# Altium PCB PCB.ESP8266.PcbDoc
Units mil, origin at the board's own origin, x right, y up, seen from the top; angles counter-clockwise.
Board outline 1110 x 1885 mil, 2 copper layers (Top Layer, Bottom Layer); 28 components, 25 nets, 141 pads, 234 vias.
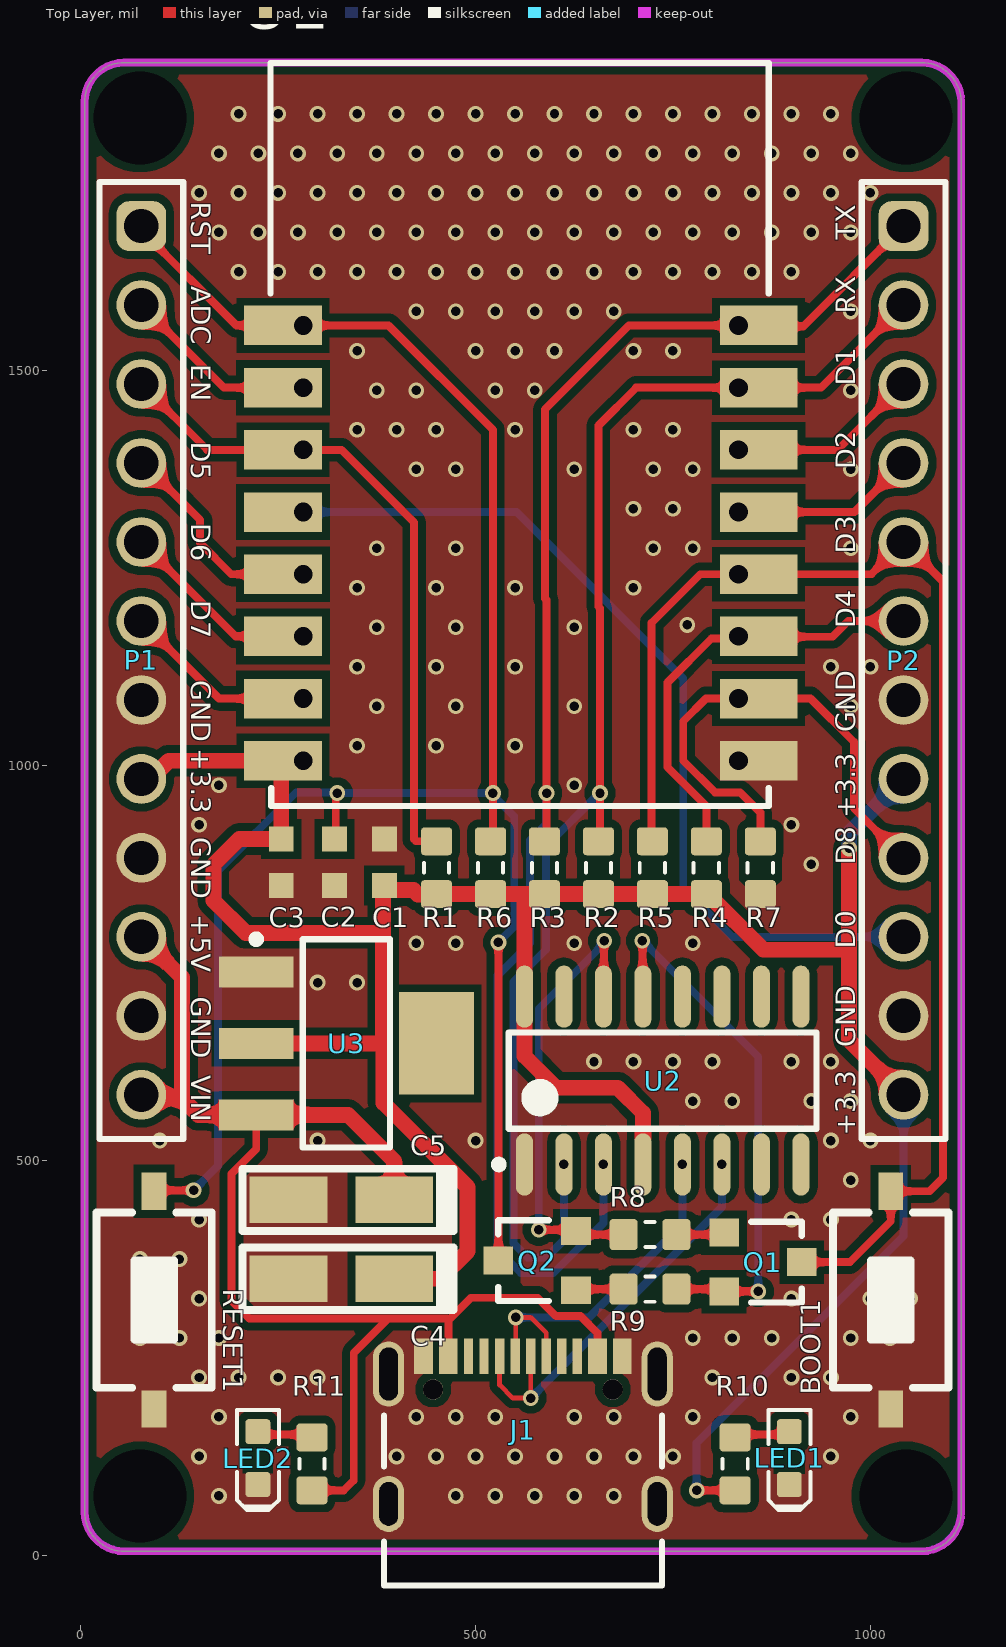
[diagram p0: Top Layer view]
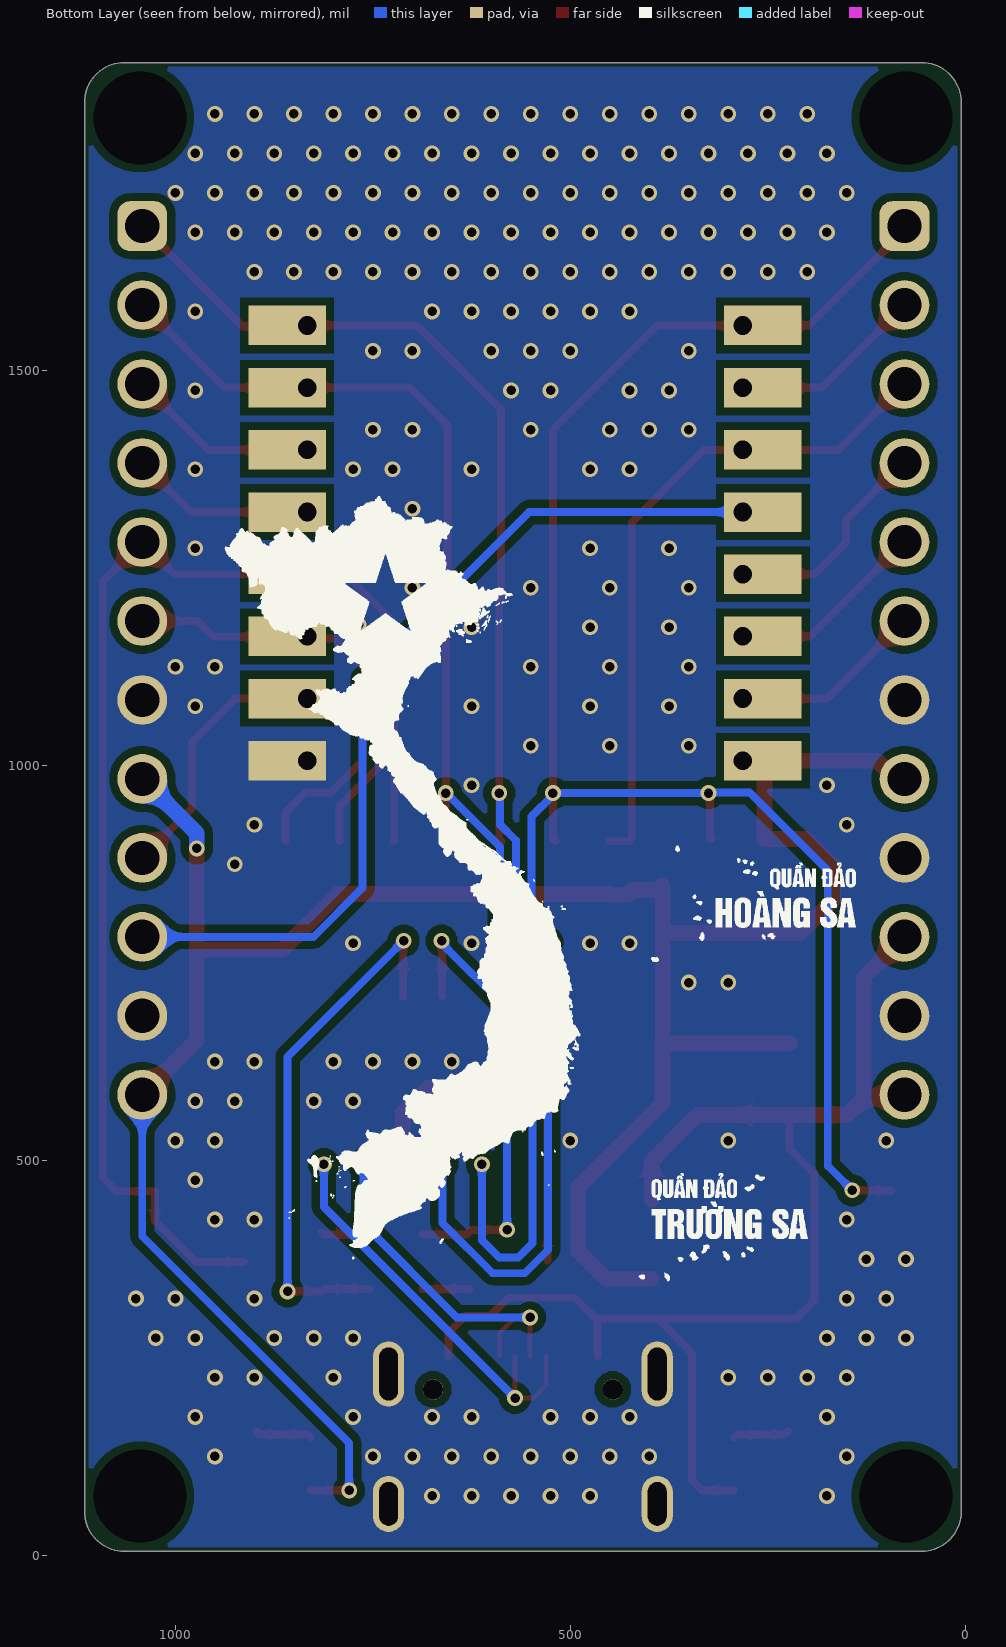
[diagram p1: Bottom Layer view, seen from below]
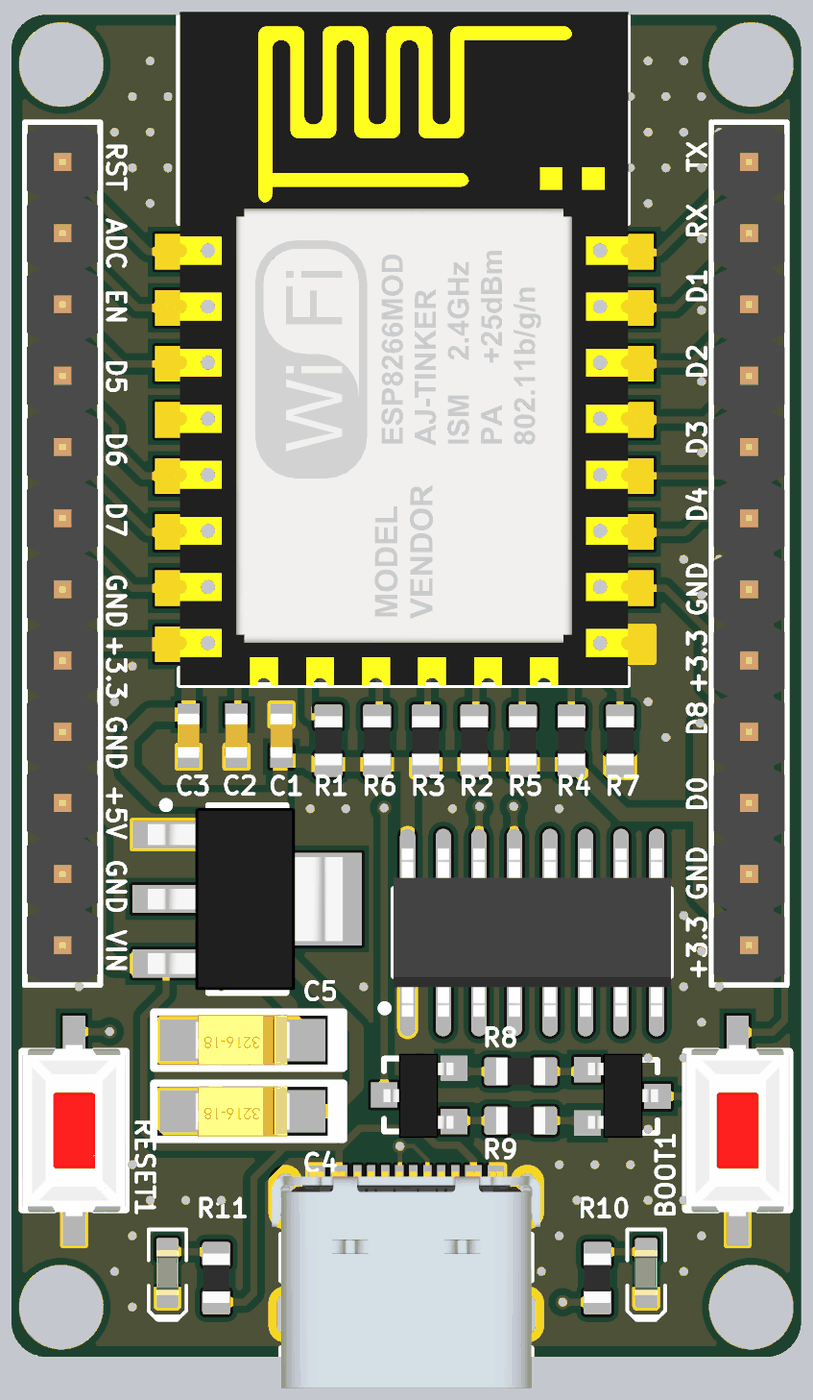
[diagram p2: 3D render of the assembled board from above, using the file's embedded part models]

## Layer stack, top to bottom
Top Solder: solder mask 0.4, Solder Resist, Dk 3.5
Top Layer: signal copper 1.4
Dielectric 1: dielectric 12.6, FR-4, Dk 4.8
Bottom Layer: signal copper 1.4
Bottom Solder: solder mask 0.4, Solder Resist, Dk 3.5

## Board outline
5,55 5,1840 cw(c55,1840) 55,1890 1065,1890 cw(c1065,1840) 1115,1840 1115,55 cw(c1065,55) 1065,5 55,5 cw(c55,55)

## Design rules (kind name [scope] priority, off if disabled: settings)
Clearance "Stitching GND" [IsStitchingVia and InNet('GND') vs (IsVia and (Not IsStitchingVia)) Or IsPad] p1: gap=10 ignorepadtopadclearanceinfootprint=FALSE
Clearance [All] p2: gap=10 ignorepadtopadclearanceinfootprint=FALSE
PlaneConnect [All] p1: planeconnectstyle=Direct reliefexpansion=20 reliefentries=4 reliefconductorwidth=10 reliefairgap=10
PolygonConnect [All] p1: connectstyle=Direct reliefconductorwidth=10 reliefentries=4 polygonreliefangle="90 Angle" airgapwidth=10
RoomDefinition SCH.ESP8266 [InComponentClass('SCH.ESP8266')] p1: confinementstyle=ConfineIn formatcopy=TRUE lockcomponents=FALSE outline -5675,-2675 -3675,-2675 -3675,-1675 -5675,-1675
RoutingVias [All] p1: holewidth=28 width=50 viastyle="Through Hole" minholewidth=12 minwidth=20 maxholewidth=20 maxwidth=35
SolderMaskExpansion [All] p1: expansion=4 istentingtop=FALSE
Width [All] p1: maxlimit=20 minlimit=6 preferedwidth=10
29 further rules are at their usual default settings.

## Classes and differential pairs
component class SCH.ESP8266: BOOT1 C1 C3 C5 J1 LED1 LED2 P1 P2 Q1 Q2 R1 R2 R3 R4 R6 R8 R9 R10 R11 RESET1 U1 U2 U3

## Components (designator, comment, footprint, x,y, rotation, side; value= is the part's Value field where it differs from the comment)
BOOT1 "SW" SW1-SMD 1025.81,323 r270 top value="SW chip 2 pin"
C1 "100nF, 25V" WCAP-CSGP_0603_L1.6W0.8H0.8_Reflow 384.5,877.43 r270 top
C2 "10uF, 6.3V" WCAP-CSGP_0603_L1.6W0.8H0.8_Reflow 321.34,877.43 r270 top
C3 "100nF, 25V" WCAP-CSGP_0603_L1.6W0.8H0.8_Reflow 254,877.43 r90 top
C4 "10uF" "tu tantalum smd3216" 330,350 r180 top
C5 "10uF" "tu tantalum smd3216" 330,450 r180 top
J1 "629722000214" 629722000214 560,110 r0 top
LED1 "Green" LED-0603-GREEN 897.31,123 r270 top
LED2 "Green" LED-0603-GREEN 224.31,123 r270 top
P1 "61301211121" 61301211121 76.8,1133 r270 top
P2 "61301211121" 61301211121 1042,1133 r270 top
Q1 "2N222" SOT23-231 863.89,371 r270 top value=C1815
Q2 "2N222" SOT23-231 578,372.89 r90 top value=C1815
R1 "Thick Film" RESC1608X55N 450.61,870.54 r90 top value=10K
R2 "Thick Film" RESC1608X55N 655.61,870.54 r90 top value=10K
R3 "Thick Film" RESC1608X55N 587.28,870.54 r90 top value=10K
R4 "Thick Film" RESC1608X55N 792.27,870.54 r90 top value=10K
R5 "Thick Film" RESC1608X55N 723.94,870.54 r90 top value=10K
R6 "Thick Film" RESC1608X55N 518.94,870.54 r90 top value=10K
R7 "Thick Film" RESC1608X55N 860.6,870.54 r90 top value=10K
R8 "Thick Film" RESC1608X55N 720.95,406 r0 top value=10K
R9 "Thick Film" RESC1608X55N 720.95,336.93 r180 top value=10K
R10 "Thick Film" RESC1608X55N 828.7,115.58 r90 top value=1K5
R11 "Thick Film" RESC1608X55N 292.93,115.58 r90 top value=1K5
RESET1 "SW" SW1-SMD 92.99,323 r270 top value="SW chip 2 pin"
U1 "ESP 12" ESP12E 557.41,1281.57 r0 top
U2 "CH340G" SO16 737,601 r90 top
U3 "LM1117-3.3V" SOT223 336.44,648.08 r270 top

## Footprints (in the part's own frame and the unit in brackets; to place one, negate y for a bottom-side part, rotate by r counter-clockwise, add the part's x,y. Pads: shape width x height; smd on the part's side, far side on the other; paste and mask are expansions set on the pad)
61301211121 [mm] "Pin Header, pitch 2.54 mm, THT, Vertical, single row, 12p"
  rrect50% 1.6x1.6 hole 1.1: 1(-13.97,0)
  round 1.6 hole 1.1: 2(-11.43,0) 3(-8.89,0) 4(-6.35,0) 5(-3.81,0) 6(-1.27,0) 7(1.27,0) 8(3.81,0) 9(6.35,0) 10(8.89,0) 11(11.43,0) 12(13.97,0)
  silkscreen extent -15.39,-1.35 15.39,1.35, body extent -15.24,-1.27 15.24,1.27, height 8.57
629722000214 [mm] "USB TYPE C VERTICAL PLUG"
  rect 0.6x1.14 smd: A1/B12(-3.2,3.605) A4/B9(-2.4,3.605) A9/B4(2.4,3.605) A12/B1(3.2,3.605)
  rect 0.3x1.14 smd: A5(-1.25,3.605) A6(-0.25,3.605) A7(0.25,3.605) A8(1.25,3.605) B5(1.75,3.605) B6(0.75,3.605) B7(-0.75,3.605) B8(-1.75,3.605)
  round 0.65 hole 0.65 unplated: MH1(-2.89,2.535) MH2(2.89,2.535)
  oval 1x1.8 hole 0.6 slot 1.4 at 90 deg: Shell(-4.32,-1.145) Shell(4.32,-1.145)
  oval 1x2.1 hole 0.6 slot 1.7 at 90 deg: Shell(-4.32,3.035) Shell(4.32,3.035)
  silkscreen extent -4.47,-3.76 4.47,1.7, body extent -4.79,-3.76 4.79,3.95, height 3.33
ESP12E [mm]
  rect 2.5x1.27 hole 0.6 copper offset -0.65,0: 1(-7,7) 2(-7,5) 3(-7,3) 4(-7,1) 5(-7,-1) 6(-7,-3) 7(-7,-5) 8(-7,-7)
  rect 2.5x1.27 hole 0.6 copper offset 0.65,0: 9(7,-7) 10(7,-5) 11(7,-3) 12(7,-1) 13(7,1) 14(7,3) 15(7,5) 16(7,7)
  silkscreen extent -8.05,-8.46 7.98,15.44, body extent -8.02,-8.46 7.99,15.54, height 2.65
LED-0603-GREEN [mm]
  round 0.254 on Mech15: 0(0,0)
  rrect25% 0.8x0.8 smd: A(-0.85,0) K(0.85,0)
  Top Layer pour cut-out: -0.5,0.5 0.5,0.5 0.5,-0.5 -0.5,-0.5
  silkscreen extent -1.55,-0.67 1.68,0.67, body extent -0.8,-0.4 0.8,0.4, height 0.75
RESC1608X55N [mm] "Chip Resistor, Body 1.6x0.8mm, EIA 0603, IPC Medium Density"
  round 0.254 on Mech15: 0(0,0)
  rrect25% 0.9x1 smd: 1(-0.85,0) 2(0.85,0)
  Top Layer pour cut-out: -0.6,0.5 -0.4,0.7 0.4,0.7 0.6,0.5 0.6,-0.5 0.4,-0.7 -0.4,-0.7 -0.6,-0.5
  silkscreen extent -0.15,-0.41 0.15,0.41, body extent -0.87,-0.47 0.88,0.48, height 0.54
SO16 [mm] "SOIC, 16-Leads, Body 9.90x3.91mm, Pitch 1.27mm, IPC Medium Density"
  oval 2x0.55 smd: 1(-2.7,4.445) 2(-2.7,3.175) 3(-2.7,1.905) 4(-2.7,0.635) 5(-2.7,-0.635) 6(-2.7,-1.905) 7(-2.7,-3.175) 8(-2.7,-4.445) 9(2.7,-4.445) 10(2.7,-3.175) 11(2.7,-1.905) 12(2.7,-0.635) 13(2.7,0.635) 14(2.7,1.905) 15(2.7,3.175) 16(2.7,4.445)
  silkscreen extent -2.82,-4.95 1.55,5.39, body extent -3,-4.95 3,4.95, height 1.4
SOT23-231 [mm]
  rect 0.9x0.95 smd mask+0: 1(0.95,-1.25)
  rect 0.9x0.95 smd: 2(-0.95,-1.25) 3(0,1.25)
  silkscreen extent -1.3,-0.38 1.3,1.25, body extent -1.52,-1.23 1.48,1.27, height 1.06
SOT223 [mm]
  rect 1x2.4 smd: 1(-2.3,-2.9) 2(0,-2.9) 3(2.3,-2.9)
  rect 3.3x2.4 smd: 4(0,2.9)
  silkscreen extent -3.47,-3.02 3.35,1.4, body extent -3.25,-3.56 3.25,3.4, height 1.68
SW1-SMD [mm]
  rect 1.2x0.8 smd: 1(-3.5,0) 2(3.5,0)
  silkscreen extent -2.82,-1.85 2.82,1.85, body extent -3.05,-1.85 3.05,1.85, height 2.5
"tu tantalum smd3216" [mm]
  rect 2.5x1.5 smd: 1(-1.7,0) 2(1.7,0)
  silkscreen extent -3.61,-1 3.17,1, body extent -1.7,-0.9 1.7,0.9, height 1.69
WCAP-CSGP_0603_L1.6W0.8H0.8_Reflow [mm] "Ceramic Capacitors, body 1.6x0.8mm"
  rect 0.8x0.8 smd: 1(-0.75,0) 2(0.75,0)
  body extent -0.8,-0.4 0.8,0.4, height 0.8

## Part data
BOOT1 RESET1: library part SW2, "Switch button 2 pin"
C1 C3: library part 885012206071, "WCAP-CSGP Multilayer Ceramic Chip Capacitor, General Purpose, size 0603, X7R, 100nF, 25V", Capacitance=100nF, Capacitance Tolerance=+/-10%, Isolation Resistance=5GOhm, Manufacturer="Wurth Elektronik", Operating Temperature max.=125C, Operating Temperature min.=-55C, Rated Voltage=25V, Ceramic Type=X7R, ComponentLink1Description="Manufacturer Link", ComponentLink1URL=http://www.we-online.de, ComponentLink2Description=Datasheet, ComponentLink2URL=https://www.we-online.com/catalog/datasheet/885012206071.pdf, Dissipation Factor=3.5%, Height=0.8mm, Length=1.6mm, Manufacturer Part Number=885012206071, Mounting Technology=SMT, Packaging="Tape and Reel", Size=0603, Technical Reference=X7R0603104K025DFCT10000, Width=0.8mm
C2: library part 885012106006, "WCAP-CSGP Multilayer Ceramic Chip Capacitor, General Purpose, size 0603, X5R, 10uF, 6.3V", Capacitance=10uF, Capacitance Tolerance=+/-20%, Isolation Resistance=0.01GOhm, Manufacturer="Wurth Elektronik", Operating Temperature max.=85C, Operating Temperature min.=-55C, Rated Voltage=6.3V, Ceramic Type=X5R, ComponentLink1Description="Manufacturer Link", ComponentLink1URL=http://www.we-online.de, ComponentLink2Description=Datasheet, ComponentLink2URL=https://www.we-online.com/catalog/datasheet/885012106006.pdf, Dissipation Factor=10%, Height=0.8mm, Length=1.6mm, Manufacturer Part Number=885012106006, Mounting Technology=SMT, Packaging="Tape and Reel", Size=0603, Technical Reference=X5R0603106M6R3DFCT10000, Width=0.8mm
C4 C5: library part "Tu tantalum 10uF 16V SMD3216", "Dán", Chung_Loai=Dán, Don_Vi=Con, Ma_Hang=MH001954, So_Chan=2, Ten_Linh_Kien="Tụ tantalum 106C-10uF 16V SMD3216"
J1: "WR-COM USB 2.0 Type C Receptacle Horizontal SMT", Manufacturer="Wurth Elektronik", Operating Temperature Max=85°C, Operating Temperature Min=-40°C, Rated Current=5A, Working Voltage="20V (DC)", Application="USB 2.0", Category="Input/Output Connectors", ComponentLink1Description="Website Link", ComponentLink1URL=https://www.we-online.com/redexpert/article/629722000214?ad, ComponentLink2Description="Datasheet Link", ComponentLink2URL=https://www.we-online.com/redexpert/spec/629722000214?ad, Gender=Receptacle, Interface Type="Type C", Manufacturer Part Number=629722000214, Match Code=WR-USB, Mount="Surface Mount", Number of Pins=16, Number of Ports=1, Orientation=Horizontal, Packaging="Tape and Reel"
LED1 LED2: library part LED_SMD_Green_0603_525nm_350mcd, "LED 0603 SMD Green 525nm 350mcd 20mA", Current - Test=20mA, Manufacturer 1=Kingbright, Manufacturer 2="Kingbright Company LLC", Manufacturer Part Number 1=APT1608ZGCK, Manufacturer Part Number 2=APT1608-WAP24, Package / Case="0603 (1608 metric)", Ratings="200mcd min; 350 mcd typ @ 20mA", Supplier Part Number 1=604-APT1608ZGCK, Voltage - Forward (Vf) @ 10mA=3.1V, Voltage - Forward (Vf) @ 20mA=3.3V, Color=Green, ComponentLink1Description=http://www.mouser.com/ds/2/216/APT1608ZGCK-262051.pdf, ComponentLink1URL=http://www.mouser.com/ds/2/216/APT1608ZGCK-262051.pdf, ComponentLink2Description="APT1608-WAP24 Datasheet", ComponentLink2URL="\\SVFI2\PBLShare\Eng\Electrical Engineering\Hardware\Altium\Libraries and Templates\Unreleased Components\Part Number Request 2013-10-02\APT1608-WAP24(Ver.1B).pdf", Lens Style/Size="Rectangle with Flat Top, 1.2mm x 0.8mm", Material=InGaN, SCDType=source, Supplier 1=Mouser, Viewing Angle=120°
P1 P2: "WR-PHD Pin Header, THT, pitch 2.54mm, Single Row, Vertical, 12p", Contact Resistance=20mOhm, Manufacturer="Wurth Elektronik", Operating Temperature="-40 to +105degC", Rated Current=3A, Withstanding Voltage=500VAC, Working Voltage=250VAC, ComponentLink1Description=Manufacturer, ComponentLink1URL=http://www.we-online.de, ComponentLink2Description=Datasheet, ComponentLink2URL=https://www.we-online.com/catalog/datasheet/61301211121.pdf, Gender="Pin Header", Manufacturer Part Number=61301211121, Mounting Technology=THT, Orientation=Vertical, Packaging=Bag, Pin Number=12, Pitch=2.54mm, Row Number=Single
Q1 Q2: "NPN 600mW, ECB"
R1 R2 R3 R4 R5 R6 R7 R8 R9: library part RES_10K_0603_1%, "Resistor SMD chip 10k Ohm 0.1W 1% 0603", Manufacturer 1=Yageo, Manufacturer Part Number 1=RC0603FR-0710KL, Package / Case="0603 (1608 Metric)", Ratings=1/10W, Supplier Part Number 1=311-10.0KHRCT-ND, Tolerance=±1%, SCDType=spec, Supplier 1=Digi-Key
R10 R11: library part RES_1K5_0603_5%, "Resistor SMD chip 1.5k Ohm 0.1W 5% 0603", Manufacturer 1=Yageo, Manufacturer Part Number 1=RC0603JR-071K5L, Package / Case="0603 (1608 metric)", Ratings="1/10 W", Supplier Part Number 1=311-1.5KGRCT-ND, Tolerance=±5%, Material="thick film", SCDType=spec, Supplier 1=Digi-Key
U1: library part ESP_12, IC=ESP8266-EX, Vendor=Ai-thinker
U2: "High and Low Side Driver", ComponentLink1Description="Manufacturer Link", ComponentLink1URL=http://www.irf.com/, ComponentLink2Description=Datasheet, ComponentLink2URL=http://www.irf.com/product-info/datasheets/data/ir2110.pdf, DatasheetVersion=PD60147J, LatestRevisionDate=04-Mar-2005, LatestRevisionNote="Stylized 3D Model Added.", Note="Pins 4, 8 and 14 are not connected", PackageDescription="DIP; 14 Leads; Row Spacing 7.62 mm; Pitch 2.54 mm", PackageReference=PDIP14, Published=8-Jun-2000, Publisher="Altium Limited"
U3: library part LM1117, "800mA Low-Dropout Linear Regulator", Creator="Nguyen Ba Bien", Website=http://group3i.net

## Free pads (board coordinates)
  round 60 hole 118.11: 2(75,1820) 3(1045,75) 4(1045,1820) 5(75,75)

## Via types
v1: diameter 20, hole 12, Top Layer to Bottom Layer, tented both sides, 234 vias

## Nets (pads, with @x,y where several pads share a name; then routed paths per layer and width w, separated by ;. In a path a pad name is that pad's centre, name@x,y a point inside that pad or via, vN(x,y) a via of type N, cw(c..) or ccw(c..) an arc to the next point about the centre after c; other vN are vias at no path point)
+3.3: C1.2 C3.2 C4.1 P1.8 P2.8 P2.12 R1.1 R2.1 R3.1 R4.1 R5.1 R6.1 R10.1 U1.8 U2.4 U2.16 U3.2 | length 3647.3
  Top Layer w10: v1(780,82) 780.06,82.06 828.65,82.06 R10.1
  Top Layer w20: P1.8 88.43,983 111.41,1005.98 U1.8@250,1005.98 ; U3.2 376.42,648.08 ; U1.8 U1.8@250,1005.98 ; 383,648.08 383,788 ; 383.37,648.08 383.37,572.63 490,466 490,385 455,350 C4.1 ; 563.18,836.97 562,835.8 U2.16 562,632 602,592 680,592 712,560 U2.4 ; 970.33,766.67 864.64,766.67 794.24,837.07 R4.1 R5.1 R2.1 R3.1 562,837.07 R6.1 R1.1 449.96,836.41 427.25,836.41 421.51,842.15 390.25,842.15 C1.2 383,846.4 383,788 ; v1(973,895) 973,766.67 973,652 P2.12 ; U1.8@250,1005.98 254,1001.98 C3.2 200.95,906.95 168,874 168,829 209,788 383,788
  Bottom Layer w10: v1(780,82) 780,142 1042,404 P2.12
  Bottom Layer w20: v1(973,895) 973,914 P2.8
+5V: C5.1 J1.A4/B9 J1.A9/B4 P1.10 P1.12 R11.1 U3.3 | length 1740.7
  Top Layer w10: U3.3 222.27,514.27 191,483 191,322.12 213.48,299.64 389.36,299.64 ; R11.1 333.11,82.11 345.76,94.76 345.76,256.03 389.36,299.64 ; J1.A4/B9 465.51,297.12 ; J1.A9/B4 654.49,281.14 632.86,302.77 601.7,302.77 578.47,326 494.39,326 465.51,297.12 ; 389.36,299.64 463,299.64 465.51,297.12
  Top Layer w20: P1.12@76.8,579.63 P1.12 80.1,579.7 127,579.7 ; P1.10 128.3,731.5 128.3,581 127,579.7 ; C5.1 396.93,499.07 338.47,557.53 U3.3 149.17,557.53 127,579.7
ADC: P1.2 U1.2 | length 248.3
  Top Layer w10: P1.2 181.38,1478.42 U1.2
D0: P2.10 U1.4 | length 1138.2
  Bottom Layer w10: U1.4 552.06,1320.94 763,1110 763,845 825,783 P2.10
D1: P2.3 U1.14 | length 243.5
  Top Layer w10: U1.14 958.68,1399.68 P2.3
D2: P2.4 U1.13 | length 234.7
  Top Layer w10: U1.13 979.94,1320.94 P2.4
D3: BOOT1.1 P2.5 Q1.3 R5.2 U1.12 | length 1709.6
  Top Layer w10: R5.2 723,904.94 723,1180.7 784.5,1242.2 858.59,1242.2 1001.2,1242.2 P2.5 1092,1233 1092,478 1074.8,460.8 BOOT1.1 1025.81,422.81 974,371 Q1.3
D4: P2.6 R4.2 U1.11 | length 553.1
  Top Layer w10: R4.2 792.27,948.59 743,997.86 743,1105 799,1161 830.54,1161 U1.11 833.46,1163 952,1163 972,1183 P2.6
D5: P1.4 U1.5 | length 280.3
  Top Layer w10: P1.4 79,1383 151,1311 151,1282 190.8,1242.2 U1.5
D6: P1.5 U1.6 | length 254.5
  Top Layer w10: P1.5 196.34,1163.46 U1.6
D7: P1.6 U1.7 | length 245.7
  Top Layer w10: P1.6 175.08,1084.72 U1.7
D8: P2.9 R7.2 U1.10 | length 634.7
  Top Layer w10: R7.2 860.6,940.4 835.02,965.98 803.16,965.98 763,1006.14 763,1056 791.72,1084.72 U1.10 924.28,1084.72 979,1030 979,946 P2.9
D+: J1.A6 J1.B6 U2.5 | length 461.6
  Top Layer w6: J1.A6 550.94,252.71 550.94,300.94 v1(551,301) 570,301 589.53,281.47 J1.B6
  Top Layer w10: U2.5 v1(762,495)
  Bottom Layer w10: v1(551,301) 643.72,301 762,419.28 v1(762,495)
D-: J1.A7 J1.B7 U2.6 | length 531.7
  Top Layer w6: J1.B7 530.47,215.53 547,199 v1(570,199) 569.92,199.08 569.92,251.85 J1.A7 ; U2.6@812,494 U2.6
  Bottom Layer w10: v1(570,199) 812,441 v1@812,494
  other v1: 812,495
DTR: Q1.1 R9.1 U2.13 | length 681.1
  Top Layer w10: v1(711,778) 711.5,777.5 711.5,707.8 U2.13 ; R9.1 811.35,336.93 Q1.1 815.08,334 v1(858,334)
  Bottom Layer w10: v1(711,778) 858,631 v1(858,334)
EN: P1.3 R1.2 U1.3 | length 848.7
  Top Layer w10: P1.3 160.12,1399.68 256.23,1399.68 330.32,1399.68 422.25,1307.75 422.25,906.56 424.81,904 R1.2
GND: BOOT1.2 C1.1 C2.2 C3.1 C4.2 C5.2 J1.A1/B12 J1.A12/B1 J1.Shell LED1.K LED2.K P1.7 P1.9 P1.11 P2.7 P2.11 R7.1 RESET1.2 U1.9 U2.1 U3.1
  other v1: 175,75 475,75 525,75 575,75 625,75 675,75 150,125 400,125 450,125 500,125 550,125 600,125 650,125 700,125 750,125 950,125 175,175 425,175 475,175 525,175 625,175 675,175 775,175 975,175 150,225 200,225 250,225 300,225 800,225 900,225 950,225 75,275 125,275 175,275 775,275 825,275 875,275 975,275 1025,275 100,325 150,325 900,325 1000,325 1050,325 75,375 125,375 150,425 900,425 950,425 975,475 100,525 300,525 500,525 950,525 1000,525 775,575 825,575 925,575 975,575 650,625 700,625 750,625 800,625 900,625 950,625 300,725 350,725 425,775 475,775 625,775 775,775 925,875 150,925 900,925 175,975 625,975 350,1025 450,1025 550,1025 375,1075 475,1075 625,1075 975,1075 350,1125 450,1125 550,1125 950,1125 1000,1125 375,1175 475,1175 625,1175 768,1178 350,1225 450,1225 550,1225 700,1225 375,1275 475,1275 725,1275 775,1275 975,1275 700,1325 750,1325 425,1375 475,1375 625,1375 725,1375 775,1375 975,1375 350,1425 400,1425 450,1425 550,1425 700,1425 750,1425 375,1475 425,1475 525,1475 575,1475 975,1475 350,1525 500,1525 550,1525 600,1525 700,1525 750,1525 425,1575 475,1575 525,1575 575,1575 625,1575 675,1575 975,1575 200,1625 250,1625 300,1625 350,1625 400,1625 450,1625 500,1625 550,1625 600,1625 650,1625 700,1625 750,1625 800,1625 850,1625 900,1625 175,1675 225,1675 275,1675 325,1675 375,1675 425,1675 475,1675 525,1675 575,1675 625,1675 675,1675 725,1675 775,1675 825,1675 875,1675 925,1675 975,1675 150,1725 200,1725 250,1725 300,1725 350,1725 400,1725 450,1725 500,1725 550,1725 600,1725 650,1725 700,1725 750,1725 800,1725 850,1725 900,1725 950,1725 1000,1725 175,1775 225,1775 275,1775 325,1775 375,1775 425,1775 475,1775 525,1775 575,1775 625,1775 675,1775 725,1775 775,1775 825,1775 875,1775 925,1775 975,1775 200,1825 250,1825 300,1825 350,1825 400,1825 450,1825 500,1825 550,1825 600,1825 650,1825 700,1825 750,1825 800,1825 850,1825 900,1825 950,1825
NetLED1_A: LED1.A R10.2 | length 71.7
  Top Layer w10: R10.2 832.41,152.75 893.6,152.75 LED1.A
NetLED2_A: LED2.A R11.2 | length 71.7
  Top Layer w10: LED2.A 228.03,152.75 289.22,152.75 R11.2
NetQ1_2: Q1.2 R8.2 | length 61.3
  Top Layer w10: R8.2 812.28,406 Q1.2
NetQ2_2: Q2.2 R9.2 | length 60.9
  Top Layer w10: Q2.2 628.66,336.93 R9.2
RST: C2.1 P1.1 Q2.3 R6.2 RESET1.1 U1.1 | length 2598.6
  Top Layer w10: P1.1 76.8,1677.67 197.31,1557.16 U1.1 389.84,1557.16 522,1425 522,907.06 R6.2 ; RESET1.1 94.19,462 v1(143,462) ; C2.1 323,908.61 v1@323,958 ; Q2.3 529,373.1 v1(529,776)
  Bottom Layer w10: v1(143,462) 174,493 174,867 272.98,965.98 324.02,965.98 v1(325,965) v1(522,965) 522,962.29 549,935.29 549,796 v1(529,776)
RTS: Q2.1 R8.1 U2.14 | length 575.5
  Top Layer w10: v1(580,412) 625.5,412 Q2.1 631.5,406 R8.1 ; U2.14 662.5,707.8 662.5,774.5 v1@663,775
  Bottom Layer w10: v1(580,412) 580,692 v1@663,775
  other v1: 663,778
RX: P2.2 R2.2 U1.15 U2.2 | length 1770.4
  Top Layer w10: U2.2 v1(612,495) ; R2.2 657.61,906 657.61,1199.11 655.61,1201.11 655.61,1430.61 703.42,1478.42 U1.15 937.42,1478.42 P2.2
  Bottom Layer w10: v1(612,495) 612,399 590,377 566,377 548,395 548,725.72 589,766.72 589,897 657,965 v1(657.61,965)
TX: P2.1 R3.2 U1.16 U2.3 | length 1952.7
  Top Layer w10: R3.2 590,906.72 590,1209.31 588,1211.31 588,1451 694.16,1557.16 U1.16 834.16,1556 915,1556 P2.1 ; U2.3@662,493 U2.3
  Bottom Layer w10: v1(590,965) 589,964 589,925.28 569,905.28 569,775 528,734 528,386.72 557.72,357 598.28,357 662,420.72 v1(662,495)
pads on no net: J1.A5 J1.A8 J1.B5 J1.B8 J1.MH1 J1.MH2 LED1.0 LED2.0 R1.0 R2.0 R3.0 R4.0 R5.0 R6.0 R7.0 R8.0 R9.0 R10.0 R11.0 U2.7 U2.8 U2.9 U2.10 U2.11 U2.12 U2.15 U3.4

## Polygon pours and split planes (outlines as drawn)
GND on Top Layer "GND" (solid, remove dead copper, pour order 0): 2,1893 1120,1893 1120,-1 2,-1
GND on Bottom Layer "GND" (solid, remove dead copper, pour order 1): 10,1885 1110,1885 1110,10 10,10

## Keep-outs
Top Layer:
  lines w10: 5,55 ccw(c55,55) 55,5 1065,5 ccw(c1065,55) 1115,55 1115,1840 ccw(c1065,1840) 1065,1890 55,1890 ccw(c55,1840) 5,1840 5,1560 5,55

## Silkscreen, mask and mechanical layers (free items; w line width, h text height)
Top Overlay:
  text "RST" at 140,1714 h25 r270
  text "TX" at 981,1666 h25 r90
  text "ADC" at 140,1607 h25 r270
  text "RX" at 981,1572 h25 r90
  text "EN" at 140,1508 h25 r270
  text "D1" at 981,1481 h25 r90
  text "D5" at 140,1410 h25 r270
  text "D2" at 981,1375 h25 r90
  text "D6" at 140,1307 h25 r270
  text "D3" at 981,1268 h25 r90
  text "D7" at 140,1209 h25 r270
  text "D4" at 981,1174 h25 r90
  text "GND" at 140,1108 h25 r270
  text "GND" at 981,1042 h25 r90
  text "+3.3" at 140,1022 h25 r270
  text "+3.3" at 981,933 h25 r90
  text "GND" at 140,909 h25 r270
  text "D8" at 981,874 h25 r90
  text "+5V" at 140,811.6 h25 r270
  text "D0" at 981,768 h25 r90
  text "GND" at 140,707 h25 r270
  text "GND" at 981,643 h25 r90
  text "VIN" at 140,608 h25 r270
  text "+3.3" at 981,531.09 h25 r90
Bottom Overlay:
  drawing of 115 lines, arcs and shapes, not listed